# EAGLE board carret (EAGLE 5.11)
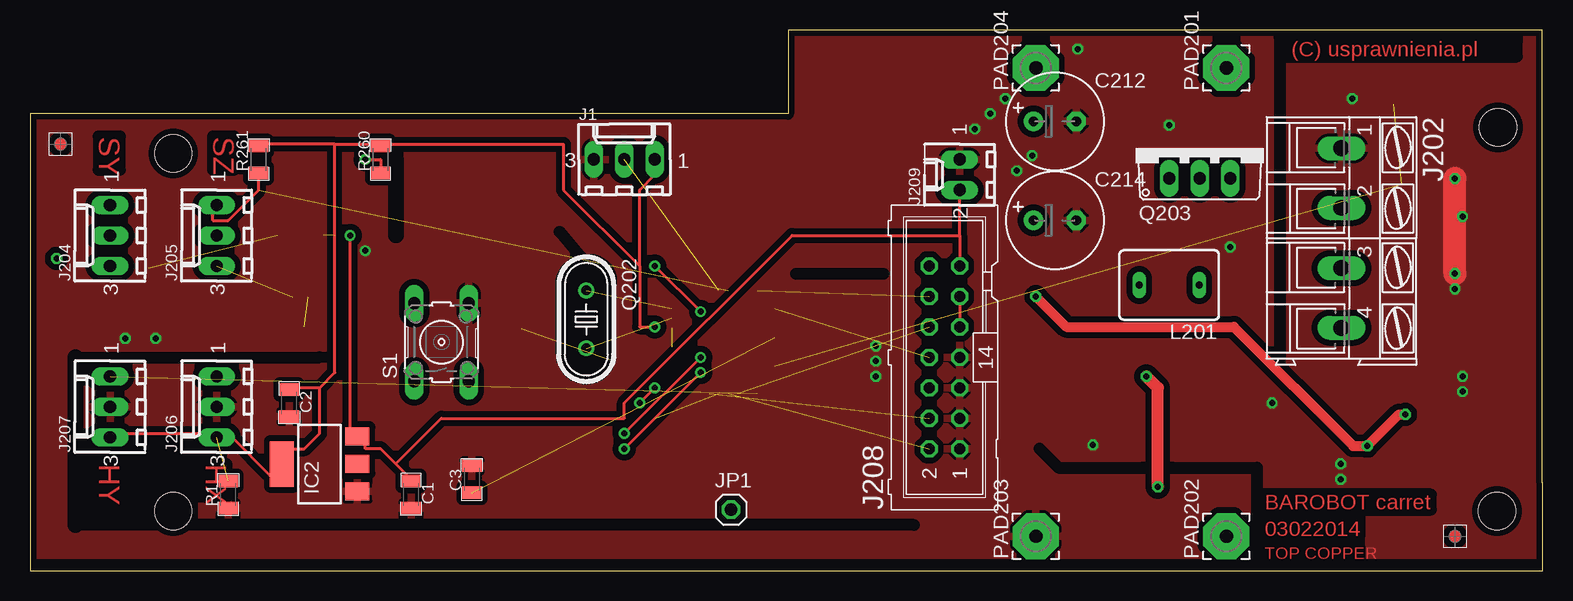
[diagram p0: board, top side]
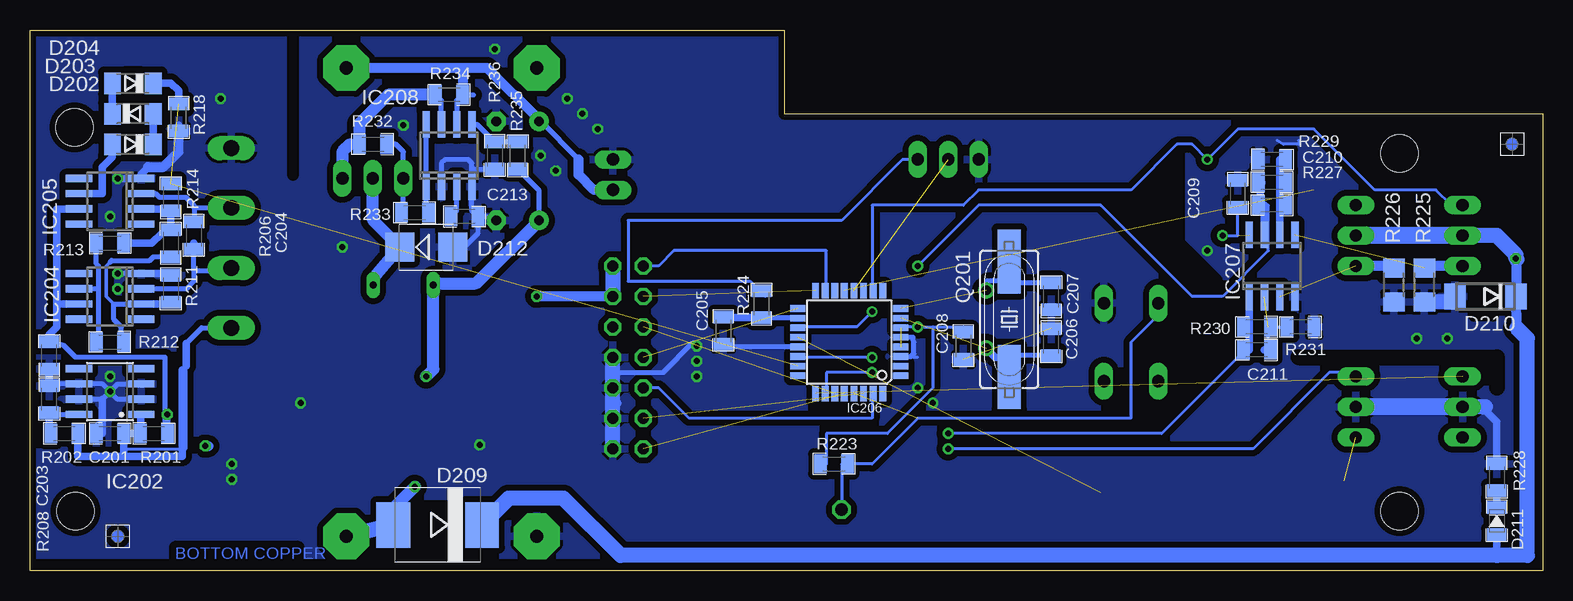
[diagram p1: board, bottom side, seen from below]

Size 126.05 x 45.09 mm. Coordinates in mm from the lower left corner, seen from the top.
Outline: 0,0 126.05,0 126.05,7.3 126.03,7.3 126.03,45.08 63.18,45.09 63.18,38.09 0,38.09 0,0
Copper layers (1*16): Top 0.035mm / dielectric 1.5mm / Bottom 0.035mm
Design rules "default *": minimum track width 10mil, minimum drill 0.5mm, track to track 10mil, track to pad 10mil, pad to pad 8mil, via to via 10mil, smd to smd 8mil, copper to edge 20mil, drill to drill 8mil, minimum pad ring 10mil, minimum via ring 8mil, stop-mask expansion 4mil, vias tented up to drill 0mil, thermal gap 10mil
Holes 3.1 mm at 122.33,36.95 122.25,4.95 11.94,4.95 11.94,34.8
tRestrict: 18 lines
bRestrict: area 4.1,21.3 to 5.7,24.1; area 90.8,2.2 to 93.3,5.4; area 116.8,34.6 to 118.1,41.6; 5 lines

## Footprints (pad centres in the part's own frame; a part is rotated, then mirrored left to right if it is on the bottom)
0805 = smd 1.044 x 1.6: 1 -1.127,0; 2 1.127,0
E3,5-8 = drill 0.813 pad 1.6 round: + -1.778,0 | drill 0.813 pad 1.6 octagon: - 1.778,0
SOD80C = smd 1.4 x 1.8: A 1.7,0; C -1.7,0
SMC = smd 2.8 x 3.8: A 3.7,0; C -3.7,0
DO214AA = smd 1.8 x 2.2: A 2.55,0; C -2.55,0
0805_DIODE = smd 1.044 x 1.6: 1 -1.127,0; 2 1.127,0
SMB = smd 2.4 x 2.4: A 2.2,0; C -2.2,0
SOT223 = smd 1.5 x 2: 1 -2.3,-3.15; 2 0,-3.15; 3 2.3,-3.15 | smd 3.8 x 2: 4 0,3.15
SO08 = smd 0.6 x 2.2: 1 -1.905,-2.6; 2 -0.635,-2.6; 3 0.635,-2.6; 4 1.905,-2.6; 5 1.905,2.6; 6 0.635,2.6; 7 -0.635,2.6; 8 -1.905,2.6
TQFP32-08 = smd 1.27 x 0.559: 1 -4.293,2.8; 2 -4.293,2; 3 -4.293,1.2; 4 -4.293,0.4; 5 -4.293,-0.4; 6 -4.293,-1.2; 7 -4.293,-2; 8 -4.293,-2.8; 17 4.293,-2.8; 18 4.293,-2; 19 4.293,-1.2; 20 4.293,-0.4; 21 4.293,0.4; 22 4.293,1.2; 23 4.293,2; 24 4.293,2.8 | smd 0.559 x 1.27: 9 -2.8,-4.293; 10 -2,-4.293; 11 -1.2,-4.293; 12 -0.4,-4.293; 13 0.4,-4.293; 14 1.2,-4.293; 15 2,-4.293; 16 2.8,-4.293; 25 2.8,4.293; 26 2,4.293; 27 1.2,4.293; 28 0.4,4.293; 29 -0.4,4.293; 30 -1.2,4.293; 31 -2,4.293; 32 -2.8,4.293
SOIC8 = smd 0.6 x 2.2: 1 -1.905,-2.6; 2 -0.635,-2.6; 3 0.635,-2.6; 4 1.905,-2.6; 5 1.905,2.6; 6 0.635,2.6; 7 -0.635,2.6; 8 -1.905,2.6
6410-03 = drill 1.016 long: 1 2.54,0; 2 0,0; 3 -2.54,0
AK300/4 = drill 1.321 long: 1 -7.493,0; 2 -2.515,0; 3 2.515,0; 4 7.493,0
ML14 = drill 0.914 octagon: 1 -7.62,-1.27; 2 -7.62,1.27; 3 -5.08,-1.27; 4 -5.08,1.27; 5 -2.54,-1.27; 6 -2.54,1.27; 7 0,-1.27; 8 0,1.27; 9 2.54,-1.27; 10 2.54,1.27; 11 5.08,-1.27; 12 5.08,1.27; 13 7.62,-1.27; 14 7.62,1.27
6410-02 = drill 1.016 long: 1 1.27,0; 2 -1.27,0
1X01 = drill 1.016 octagon: 1 0,0
BS75 = drill 0.6 long: 1 -2.5,0; 2 2.5,0
3,81/1,1 = drill 1.118 pad 3.81 octagon: 1 0,0
HC49UP = smd 5.334 x 1.93: 1 -4.826,0; 2 4.826,0
HC49U-V = drill 0.813 round: 1 -2.413,0; 2 2.413,0
TO220AV = drill 1.016 long: B -2.54,-2.54; C 0,-2.54; E 2.54,-2.54
R1206 = smd 1.6 x 1.803: 1 -1.422,0; 2 1.422,0
B3F-10XX = drill 1.016 long: 1 -3.251,2.261; 2 3.251,2.261; 3 -3.251,-2.261; 4 3.251,-2.261

## Placement (x,y rotation side)
C1  100n  [0805]  31.75,6.35 270 top
C2  100n  [0805]  21.59,13.97 270 top
C3  100n  [0805]  36.83,7.62 90 top
C201  100n  [0805]  119.38,11.43 0 bottom
C203  100n  [0805]  124.46,17.94 90 bottom
C204  100n  [0805]  112.39,27.94 270 bottom
C205  100n  [0805]  68.26,20 270 bottom
C206  22p  [0805]  40.96,19.05 270 bottom
C207  22p  [0805]  40.96,22.86 90 bottom
C208  100n  [0805]  48.26,18.73 270 bottom
C209  100n  [0805]  25.4,31.43 270 bottom
C210  100n  [0805]  22.54,32.38 180 bottom
C211  100n  [0805]  23.81,18.41 180 bottom
C212  [E3,5-8]  85.41,37.47 0 top
C213  [0805]  89.85,29.53 0 bottom
C214  [E3,5-8]  85.41,29.21 0 top
D202  1N4148  [SOD80C]  117.47,35.56 180 bottom
D203  1N4148  [SOD80C]  117.47,38.1 0 bottom
D204  1N4148  [SOD80C]  117.47,40.64 180 bottom
D209  SK36  [SMC]  92.08,3.81 180 bottom
D210  SS20  [DO214AA]  4.76,22.86 180 bottom
D211  LED GRN  [0805_DIODE]  3.81,4.13 270 bottom
D212  [SMB]  93.03,26.99 0 bottom
IC2  LD117ASTR  [SOT223]  24.13,8.89 90 top
IC202  TL431  [SO08]  119.38,14.92 90 bottom
IC204  OP07  [SO08]  119.38,22.86 90 bottom
IC205  OP07  [SO08]  119.38,30.8 90 bottom
IC206  ATMEGA328  [TQFP32-08]  57.78,19.05 180 bottom
IC207  LM358D  [SO08]  22.54,25.4 0 bottom
IC208  MC34063AD  [SOIC8]  91.12,34.61 0 bottom
J1  WF03S-LF  [6410-03]  49.53,34.29 0 top
J202  [AK300/4]  109.28,27.73 270 top
J204  WF03S-LF  [6410-03]  6.67,27.94 90 top
J205  WF03S-LF  [6410-03]  15.56,27.94 90 top
J206  WF03S-LF  [6410-03]  15.56,13.65 90 top
J207  WF03S-LF  [6410-03]  6.67,13.65 90 top
J208  BH14S  [ML14]  76.2,17.78 90 top
J209  WF02-S  [6410-02]  77.47,33.02 90 top
JP1  [1X01]  58.42,5.08 0 top
L201  [BS75]  94.93,23.81 180 top
PAD201  [3,81/1,1]  99.69,41.91 90 top
PAD202  [3,81/1,1]  99.69,2.86 90 top
PAD203  [3,81/1,1]  83.82,2.86 90 top
PAD204  [3,81/1,1]  83.82,41.91 90 top
Q201  16 MHz  [HC49UP]  44.45,20.95 270 bottom
Q202  16 MHz  [HC49U-V]  46.35,20.95 270 top
Q203  TIP42C  [TO220AV]  97.47,35.24 0 top
R1  82R  [0805]  16.51,6.35 90 top
R201  82R  [0805]  115.73,11.43 0 bottom
R202  3k 1%  [0805]  123.19,11.43 0 bottom
R206  8k2  [0805]  114.3,27.3 90 bottom
R208  1k 1%  [0805]  124.46,14.29 270 bottom
R211  330k 1%  [0805]  114.3,23.5 270 bottom
R212  1k 1%  [0805]  119.38,19.05 180 bottom
R213  1k 1%  [0805]  119.38,27.3 0 bottom
R214  330k 1%  [0805]  114.3,31.11 90 bottom
R218  470R  [0805]  113.67,37.78 270 bottom
R223  10k  [0805]  59.05,8.89 0 bottom
R224  82R  [0805]  65.09,22.23 90 bottom
R225  0R047 1%  [R1206]  9.84,23.81 270 bottom
R226  0R047 1%  [R1206]  12.38,23.81 270 bottom
R227  100k 1%  [0805]  22.54,30.48 180 bottom
R228  470R  [0805]  3.81,7.78 270 bottom
R229  1k 1%  [0805]  22.54,34.29 0 bottom
R230  100k 1%  [0805]  23.81,20.32 180 bottom
R231  1k 1%  [0805]  20.16,20.32 180 bottom
R232  [0805]  97.47,35.56 180 bottom
R233  [0805]  93.98,29.84 180 bottom
R234  [0805]  91.12,39.69 180 bottom
R235  [0805]  85.41,34.61 90 bottom
R236  [0805]  87.31,34.61 270 bottom
R260  10k  [0805]  29.21,34.29 90 top
R261  10k  [0805]  19.05,34.29 90 top
S1  [B3F-10XX]  34.29,19.05 90 top
U$1  [FIDUCIAL_G10S]  2.54,35.56 0 top
U$2  [FIDUCIAL_G10S]  118.75,2.86 0 top
U$3  [FIDUCIAL_G10S]  118.75,2.86 0 bottom
U$4  [FIDUCIAL_G10S]  2.54,35.56 0 bottom

## Library data of the parts
C1-C3 C201 C203-C211 C213 D211 R1 R202 R206 R208 R211-R214 R218 R223 R224 R227-R236 R260 R261 = barobot
C212 C214 = rcl
D202-D204 D209 D210 D212 = diode
IC2 = v-reg; URL: http://www.tme.eu/pl/details/ld1117s50/stabilizatory-napiecia-nieregulowane-ldo/st-microelectronics/ld1117s50tr/#
IC202 = 0alib
IC204 IC205 IC207 = linear
IC206 = atmel
IC208 = mc34063
J1 J204-J207 J209 = con-molex
J202 = con-ptr500
J208 = con-ml
JP1 = pinhead
L201 = inductor-neosid
PAD201-PAD204 = wirepad
Q201 Q202 = crystal
Q203 = transistor-power
R201 = barobot; A: a
R225 R226 = resistor
S1 = switch-omron; MPN: B3F-1000; OC_FARNELL: 176432; OC_NEWARK: 36M3542
U$1-U$4 = dicons

## Nets
+6V: C214.+ D209.A L201.2 PAD202.1 R235.1
+10V: C201.2 IC202.1 J202.4 R201.1 R202.2
+12V: C1.1 C203.2 C209.2 C212.+ IC2.3 IC204.7 IC205.7 IC207.8 IC208.6 J208.9 J208.11 J208.13 J209.2 PAD201.1 R201.2 R234.1
GND: C1.2 C2.2 C3.2 C201.1 C203.1 C205.2 C206.1 C207.1 C208.2 C209.1 C212.- C213.2 C214.- D210.A D212.A IC2.1 IC202.2 IC202.3 IC202.6 IC202.7 IC204.4 IC205.4 IC206.3 IC206.5 IC206.21 IC207.4 IC208.2 IC208.4 J1.3 J202.1 J206.2 J207.2 J208.1 J208.3 J208.5 J208.7 J209.1 PAD203.1 R1.1 R208.1 R211.1 R218.2 R225.2 R226.2 R228.1 R229.1 R231.1 R236.2 S1.4
MISO: IC206.16 J208.12
MOSI: IC206.15 J208.14
N$2: IC206.31 J208.6
N$4: IC206.28 J208.2
N$5: IC206.27 J208.10
N$11: D209.C D210.C D211.2 J204.2 J205.2
N$14: IC206.12 J1.2
N$24: IC206.10 J204.1 R260.1
N$25: IC206.13 J205.1 R261.1
N$26: IC206.25 J207.1
N$27: C207.2 IC206.8 Q201.1 Q202.1
N$28: IC206.26 J206.1
N$29: IC207.5 J204.3 R225.1
N$30: IC207.3 J205.3 R226.1
N$31: C211.2 IC206.22 IC207.1 R230.2
N$37: C210.2 IC206.19 IC207.7 R227.2
N$38: IC206.30 J208.4
N$41: D204.C IC206.23 R214.2 R218.1
N$43: IC202.8 R202.1 R208.2
N$46: C206.2 IC206.7 Q201.2 Q202.2
N$47: D211.1 R228.2
N$48: C210.1 IC207.6 R227.1 R229.2
N$49: C204.2 IC204.3 J202.3
N$50: C204.1 IC205.3 J202.2
N$51: IC204.2 R206.1 R211.2 R212.1
N$52: IC204.6 R212.2 R213.1
N$53: IC205.2 R206.2 R213.2 R214.1
N$54: D202.A IC205.6
N$55: D202.C D203.A
N$56: D203.C D204.A
N$57: C205.1 IC206.18 R224.1
N$59: C3.1 IC206.20
N$61: C211.1 IC207.2 R230.1 R231.2
N$64: IC208.7 Q203.E R232.2 R234.2
N$65: IC208.1 IC208.8 R233.1
N$66: Q203.B R232.1 R233.2
N$67: C213.1 IC208.3
N$68: IC208.5 R235.2 R236.1
N$71: D212.C L201.1 Q203.C
RESET: IC206.29 JP1.1 R223.2 S1.2
SCK: IC206.17 J208.8
VCC: C2.1 C208.1 IC2.4 IC206.4 IC206.6 J1.1 J206.3 J207.3 R1.2 R223.1 R224.2 R260.2 R261.2

## Tracks (layer width: path | path; a pad name or v marks a point on that pad's centre or on a via)
+6V  (via drill 0.5)
  Top 1.016: v93.03,16.19 93.98,15.24 v93.98,6.99
  Bottom 0.406: L201.2 91.92,23.94 | R235.1 83.63,31.7 C214.+
  Bottom 1.016: 91.92,23.94 88.9,23.94 C214.+ | L201.2 92.43,16.79 v93.03,16.19 | v93.98,6.99 95.78,5.19 D209.A
  Bottom 1.27: D209.A PAD202.1
+10V
  Bottom 0.254: 113.03,17.78 113.03,10.16 118.11,10.16 118.23,10.16
  Bottom 0.406: IC202.1 116.84,13.02 | 113.03,18.95 111.74,20.24 J202.4
  Bottom 0.61: R202.2 122.08,9.53 118.22,9.53 | 118.22,9.53 118.23,10.16 C201.2 R201.1 116.84,13.02 IC202.1 | 118.22,9.53 113.35,9.53 113.35,16.73 | 113.03,18.95 113.03,17.78 113.03,17.05
+12V  (via drill 0.5)  (1 unrouted)
  Top 0.254: J208.11 J208.9 | 77.47,27.94 J208.13 | 77.47,27.94 J209.2 | 30.48,8.89 29.21,10.16 27.94,10.16 27.94,11.43 IC2.3 26.67,11.43 v26.67,27.94 | 30.48,8.89 31.75,7.62 C1.1 | 30.48,8.89 34.29,12.7 49.53,12.7 49.53,13.97 63.5,27.94 77.47,27.94
  Top 0.813: v114.62,13.02 114.08,13.02 v111.44,10.38 110.27,10.38 100.33,20.32 86.36,20.32 v83.82,22.86
  Bottom 0.254: v26.67,27.94 25.4,27.94 C209.2 25.4,30.48
  Bottom 0.406: 114.78,12.06 114.78,17.78 114.94,17.78 122.24,17.78 123.24,18.78 C203.2 | IC208.6 90.49,39.2 R234.1 89.09,39.69 | 80.33,34.29 83.5,37.47
  Bottom 0.508: R201.2 114.6,11.89 114.78,12.06 114.62,12.22 v114.62,13.02
  Bottom 0.61: IC205.7 123.83,30.16 123.83,22.23 | 123.83,22.23 123.83,20.32 124.46,19.68 C203.2 | 123.83,22.23 IC204.7
  Bottom 0.813: v111.44,10.38 111.19,10.38 | J208.11 v83.82,22.86 | 90.17,41.91 87.95,41.91 83.63,37.59 | 90.17,41.91 PAD201.1 | 83.5,37.47 83.63,37.59 | 80.33,34.29 80.33,33.02 79.06,31.75 J209.2 | R234.1 90,41.74 90.17,41.91 | 83.63,37.59 C212.+
  Bottom 1.27: J208.13 J208.11
GND  (via drill 0.5)  (1 unrouted)
  Top 0.254: v50.8,13.97 v52.07,15.24
  Top 1.93: v118.75,24.77 v118.75,32.7
  Bottom 0.254: 52.07,17.78 53.34,17.78 IC206.3 | 50.77,13.94 v50.8,13.97 | v52.07,15.24 52.1,15.27 | 22.13,35.89 21.59,35.56 20.32,35.56 20.32,35.89
  Bottom 0.406: IC206.21 68.26,18.65 | 68.26,18.65 68.58,18.65 | IC206.3 52.63,17.85 52.39,18.1 52.39,19.05 52.47,19.45 IC206.5 | 70.8,19 73.3,16.51 77.47,16.51 | R208.1 124.14,15.56 IC202.6 120.02,15.56 v119.38,14.92 | IC202.7 120.02,14.29 v119.38,14.92 | IC202.2 118.75,14.29 v119.38,14.92 | IC202.3 118.75,15.56 119.22,15.08 | IC204.4 v118.75,24.77 | 68.26,18.65 C205.2 | 89.22,33.66 89.22,33.97 89.53,34.29 91.44,34.29 91.76,33.97 IC208.2 | 89.22,33.66 IC208.4 89.22,30.02 C213.2 | R236.2 89.04,33.48 89.22,33.66 | C213.2 88.08,29.53 C214.- | D212.A 89.85,26.99 88.72,28.11 C213.2
  Bottom 0.61: R228.1 3.81,12.38 5.08,13.65 | IC204.4 114.3,24.77 R211.1 | 113.67,36.83 R218.2 113.67,37.15 | C201.1 120.02,11.43 120.02,14.29 | v118.75,32.7 IC205.4 | IC205.4 116.2,32.7 | R208.1 C203.1 | v119.38,14.92 119.22,15.08 | 116.2,33.66 116.78,33.08 IC205.4
  Bottom 0.813: 77.47,13.97 77.15,13.97 | R218.2 113.67,34.92 114.94,33.66 116.2,33.66
  Bottom 1.27: 4.76,13.65 5.08,13.65 J207.2 | D210.A 7.86,22.39 R225.2 | J208.1 J208.3 77.47,13.97 J208.5 77.47,16.51 J208.7
  Bottom 1.422: J207.2 J206.2
  other vias: 7.94,19.37 10.48,19.37 109.22,8.89 110.17,39.37 109.22,7.62 119.38,29.53 118.75,23.5 119.38,16.19 81.28,39.37 70.48,18.73 70.48,17.46 70.48,16.19 83.5,34.61 82.23,33.34 80.01,38.1 78.74,36.83 103.5,13.97 88.58,10.48 100.01,26.99 94.93,37.15 87.31,43.5 27.94,26.67
  pour Top (isolate 0.508, rank 3): 0,38.1 63.5,38.1 63.5,44.45 125.73,44.45 125.73,1.27 0,1.27
  pour Bottom (isolate 0.508): 0,38.1 63.5,38.1 63.5,44.45 125.73,44.45 125.73,1.27 0,1.27
MISO  (1 unrouted)
MOSI
  Bottom 0.254: J208.14 73.66,25.4 72.39,26.67 59.69,26.67 59.69,22.86 IC206.15
N$2
  Bottom 0.254: J208.6 73.66,15.24 71.12,12.7 55.88,12.7 55.88,15.24 IC206.31
N$4  (1 unrouted)
N$5  (1 unrouted)
N$11  (via drill 0.5)
  Bottom 0.61: 3.81,1.27 D211.2
  Bottom 0.813: 2.14,20.23 D210.C | 2.14,23.18 2.14,25.95
  Bottom 1.27: J204.2 3.81,27.94 2.22,26.35 v2.22,26.04 2.14,25.95 | D210.C 2.14,23.18 | 2.14,20.23 1.27,19.37 1.27,1.27 3.81,1.27 76.83,1.27 81.6,6.03 86.15,6.03 D209.C
  Bottom 1.422: J204.2 J205.2
N$14  (1 unrouted)
N$24  (via drill 0.5)
  Top 0.254: v27.94,34.29 29.21,34.29 R260.1 29.21,33.02
  Bottom 0.254: IC206.10 55.88,22.86 55.88,30.48 48.26,30.48 46.99,31.75 34.29,31.75 30.48,35.56 29.21,35.56 v27.94,34.29 25.4,36.83 19.05,36.83 13.97,31.75 8.89,31.75 7.62,30.48 J204.1
N$25  (1 unrouted)
  Top 0.254: R261.1 19.05,31.75 16.51,29.21 15.24,29.21 15.24,30.48 J205.1
N$26  (1 unrouted)
N$27  (1 unrouted)
  Bottom 0.406: Q202.1 46.35,24.13 44.45,24.13 44.31,23.99 C207.2
  Bottom 0.61: 44.45,23.86 44.45,24.13 Q201.1
N$28  (via drill 0.5)
  Top 0.254: v49.53,10.16 v55.88,16.51
  Bottom 0.254: v55.88,16.51 59.69,16.51 59.69,15.24 IC206.26 | v49.53,10.16 24.13,10.16 17.78,16.51 16.51,16.51 J206.1
N$29  (1 unrouted)
  Bottom 0.61: 9.21,25.4 R225.1
  Bottom 0.813: J204.3 9.21,25.4
N$30  (1 unrouted)
  Bottom 0.61: R226.1 13.18,25.4
  Bottom 0.813: 13.18,25.4 J205.3
N$31  (via drill 0.5)
  Top 0.254: v49.53,11.43 v55.88,17.78
  Bottom 0.254: v55.88,17.78 62.23,17.78 IC206.22 | v49.53,11.43 31.75,11.43 25.4,17.78 C211.2
  Bottom 0.61: C211.2 24.45,18.41 24.45,20.32 | 24.45,20.32 IC207.1 | 24.45,20.32 R230.2
N$37  (via drill 0.5)
  Top 0.254: v52.07,25.4 v55.88,21.59
  Bottom 0.254: v55.88,21.59 57.15,20.32 62.23,20.32 IC206.19 | v52.07,25.4 46.99,30.48 36.83,30.48 29.21,22.86 26.67,22.86 22.86,26.67 22.86,30.48 R227.2 24.13,30.48
  Bottom 0.61: IC207.7 23.18,30.48 R227.2 23.39,32.38 C210.2
N$38  (1 unrouted)
N$41  (2 unrouted)
  Bottom 0.61: R218.1 113.67,40.01 114.3,40.64 D204.C
N$43
  Bottom 0.406: R208.2 124.14,13.02 IC202.8 121.92,13.02
  Bottom 0.61: R202.1 124.46,11.43 R208.2
N$46  (1 unrouted)
  Bottom 0.406: C206.2 44.31,17.92 44.45,17.78
  Bottom 0.61: 44.45,17.78 44.45,18.05 | 44.45,17.78 Q201.2 | Q202.2 45.59,17.78 44.45,17.78
N$47
  Bottom 0.61: R228.2 D211.1
N$48
  Bottom 0.61: IC207.6 21.91,30.48 | 21.91,30.48 21.91,32.38 | 21.91,32.38 21.91,34.29 R229.2 | 21.91,32.38 C210.1 | 21.91,30.48 R227.1
N$49
  Bottom 0.406: IC204.3 113.03,23.5 112.39,24.13 112.39,25 | 112.39,26.99 C204.2 112.39,25 | J202.3 109.28,25 112.39,25
  Bottom 0.61: C204.2 112.39,27.3
N$50
  Bottom 0.406: IC205.3 115.57,31.43 115.25,31.11 113.03,31.11 112.39,30.48 112.39,30.25 112.35,30.25 | C204.1 112.35,29.26 112.35,30.25 | J202.2 112.35,30.25
N$51
  Bottom 0.305: 119.38,25.72 119.69,25.4 119.7,25.4 119.7,22.86 119.06,22.23
  Bottom 0.406: IC204.2 119.06,22.23 119.06,20.95 118.43,20.32 118.43,19.23 R212.1 | 119.38,25.72 119.24,25.86 116.06,25.86 115.75,26.18 R206.1
  Bottom 0.61: IC204.2 114.62,22.23 114.48,22.37 R211.2
N$52
  Bottom 0.406: 120.33,23.5 120.33,25.4 120.51,25.57 R213.1 | 120.33,23.5 120.33,19.05 R212.2 | 120.33,23.5 IC204.6
N$53
  Bottom 0.61: IC205.2 114.47,30.16 R214.1 R206.2 115.08,28.11 115.89,27.3 R213.2
N$54
  Bottom 0.61: IC205.6 120.02,31.43 120.02,33.66 119.17,34.49 D202.A 119.38,35.35
N$55
  Bottom 0.61: D202.C D203.A
N$56
  Bottom 0.61: D203.C D204.A
N$57
  Bottom 0.406: IC206.18 64.76,21.05 | 68.17,21.1 68.23,21.1 C205.1
  Bottom 0.61: 68.17,21.1 R224.1 64.81,21.1 64.76,21.05
N$59  (1 unrouted)
N$61  (1 unrouted)
  Bottom 0.254: R231.2 R230.1 22.86,20.32 22.86,19.05 C211.1
  Bottom 0.61: C211.1 23.18,18.41
N$64
  Bottom 0.406: IC208.7 91.76,39.2 R234.2 | R232.2 99.38,35.56
  Bottom 1.016: 99.38,35.56 100.01,34.92 Q203.E | R234.2 96.2,39.69 98.6,37.29 R232.2
N$65
  Bottom 0.406: IC208.8 IC208.1 93.03,29.99 R233.1
N$66
  Bottom 0.406: R232.1 95.57,35.56 94.93,34.92 Q203.B 94.93,30.02 R233.2
N$67
  Bottom 0.406: IC208.3 90.49,30.02 C213.1
N$68
  Bottom 0.406: R235.2 R236.1 88.78,37.21 IC208.5
N$71
  Bottom 0.406: L201.1 97.13,24.75
  Bottom 1.016: 97.13,24.75 D212.C 97.47,29.23 Q203.C
RESET  (1 unrouted)
  Bottom 0.254: JP1.1 58.42,8.89 R223.2 55.88,8.89 52.07,12.7 34.29,12.7 34.29,19.05 31.75,21.59 S1.2
SCK  (1 unrouted)
VCC  (via drill 0.5)  (2 unrouted)
  Top 0.254: J207.3 7.62,11.43 15.24,11.43 J206.3 16.51,11.43 20.32,7.62 21.59,7.62 21.59,8.89 | 25.4,35.56 29.21,35.56 | 25.4,35.56 19.05,35.56 R261.2 | 24.13,15.24 21.59,15.24 C2.1 | 24.13,15.24 24.13,11.43 22.86,10.16 21.59,10.16 21.59,8.89 | 25.4,35.56 25.4,16.51 24.13,15.24 | 21.59,8.89 IC2.4 | v52.07,20.32 50.8,20.32 50.8,25.4 | 50.8,25.4 50.8,31.75 52.07,33.02 J1.1 | 29.21,35.56 44.45,35.56 44.45,31.75 50.8,25.4 | 29.21,35.56 R260.2
  Bottom 0.254: 50.8,20.32 48.26,20.32 C208.1 | 50.8,20.32 v52.07,20.32 53.34,20.32 IC206.6 | 50.8,20.32 50.8,15.24 54.61,11.43 59.69,11.43 59.69,8.89 R223.1 | J1.1 53.34,34.29 58.42,29.21 76.2,29.21 76.2,24.13 66.04,24.13 64.77,22.86 R224.2

## Text on the board
Top: (C) usprawnienia.pl | SY | SZ | HY | HX | BAROBOT carret | 03022014 | TOP COPPER
Bottom: BOTTOM COPPER
HelpDim: PRZETWORNICA